# Altium PCB NEpic.PcbDoc (part 3 of 5)
Units mil, origin at the board's own origin, x right, y up, seen from the top; angles counter-clockwise.
Board outline 1660 x 1990 mil, 4 copper layers (Top Layer, GND, VCC, Bottom Layer); 30 components, 61 nets, 194 pads, 84 vias.
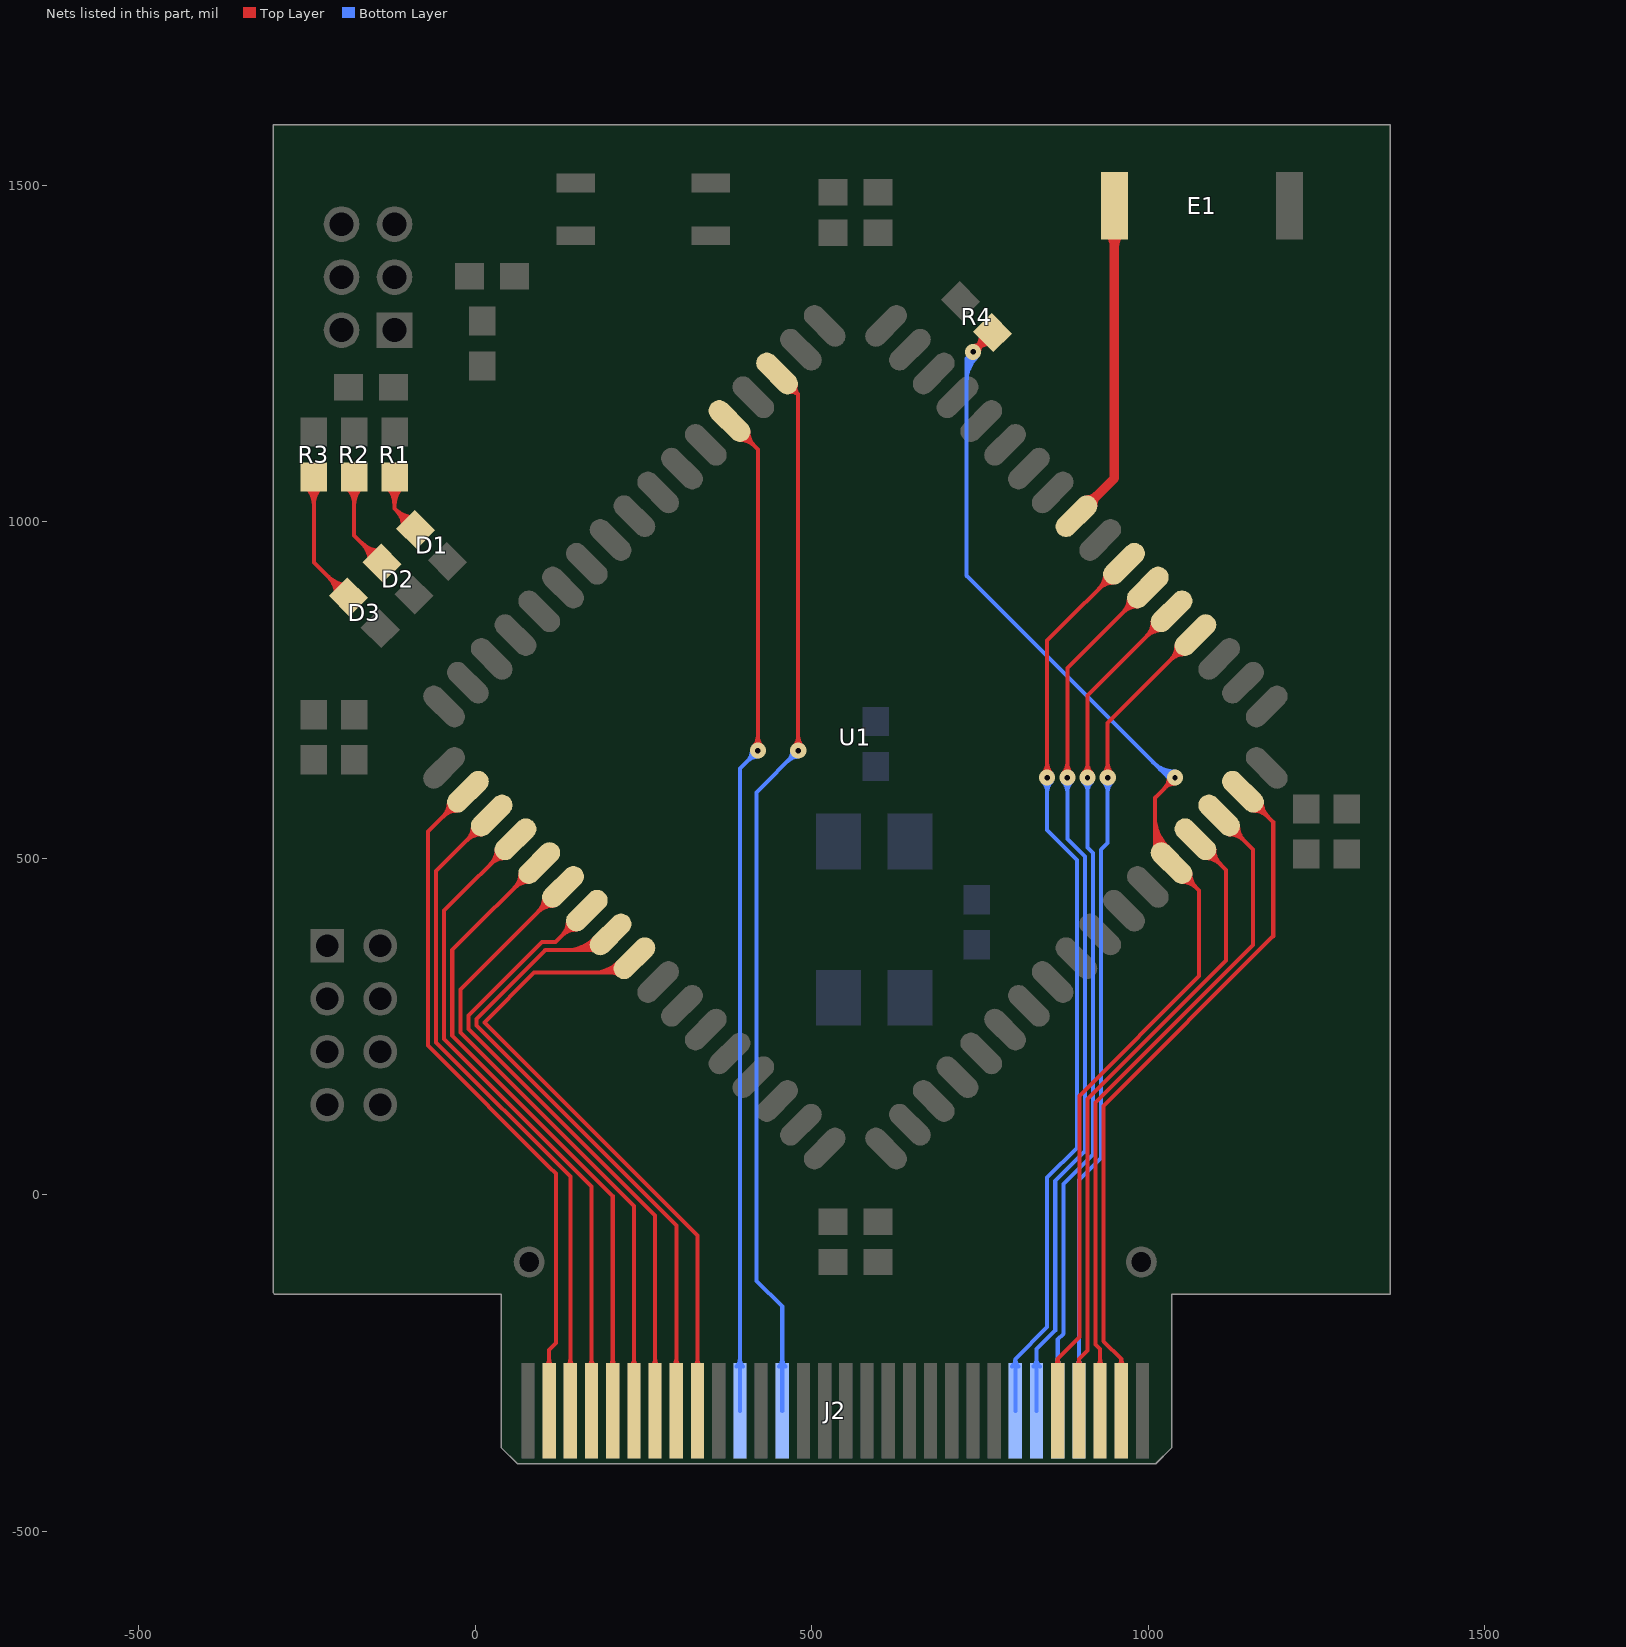
[diagram p5: the nets of this part, all layers, seen from the top]

## Via types
v1: diameter 24, hole 8, Top Layer to Bottom Layer, tented both sides, 78 vias
v2: diameter 150, hole 126, Top Layer to Bottom Layer, 4 vias
v3: diameter 40, hole 20, Top Layer to Bottom Layer, tented both sides, 2 vias

## Nets (pads, with @x,y where several pads share a name; then routed paths per layer and width w, separated by ;. In a path a pad name is that pad's centre, name@x,y a point inside that pad or via, vN(x,y) a via of type N, cw(c..) or ccw(c..) an arc to the next point about the centre after c; other vN are vias at no path point) (continued)
MOSI0/SDA: J2.39 U1.56 | length 2172.3
  Top Layer w6: U1.56@377.92,1149.92 418.92,1108.92 420,1107.84 v1(420,660) ; U1.56@393.23,1121.86 cw(c393.23,1091.08) 415,1112.85 ; U1.56@393.23,1121.86 cw(c393.23,1091.08) 415,1112.85 ; U1.56@393.23,1121.86 cw(c393.23,1091.08) 415,1112.85 ; U1.56@393.23,1121.86 cw(c393.23,1091.08) 415,1112.85 ; U1.56@393.23,1127.86 cw(c393.23,1111.57) 404.75,1123.09 ; U1.56@393.23,1127.86 cw(c393.23,1111.57) 404.75,1123.09 ; U1.56@393.23,1127.86 cw(c393.23,1111.57) 404.75,1123.09 ; U1.56@393.23,1127.86 cw(c393.23,1111.57) 404.75,1123.09 ; U1.56@399.98,1134.61 ccw(c416.27,1134.61) 404.75,1123.09 ; U1.56@399.98,1134.61 ccw(c416.27,1134.61) 404.75,1123.09 ; U1.56@399.98,1134.61 ccw(c416.27,1134.61) 404.75,1123.09 ; U1.56@399.98,1134.61 ccw(c416.27,1134.61) 404.75,1123.09 ; U1.56@405.98,1134.61 ccw(c436.76,1134.61) 415,1112.85 ; U1.56@405.98,1134.61 ccw(c436.76,1134.61) 415,1112.85 ; U1.56@405.98,1134.61 ccw(c436.76,1134.61) 415,1112.85 ; U1.56@405.98,1134.61 ccw(c436.76,1134.61) 415,1112.85 ; v1@413.64,666.36 ccw(c398.27,681.73) 420,681.73 ; v1@413.64,666.36 ccw(c398.27,681.73) 420,681.73 ; v1@413.64,666.36 ccw(c398.27,681.73) 420,681.73 ; v1@413.64,666.36 ccw(c398.27,681.73) 420,681.73 ; 420,681.73 ccw(c441.73,681.73) v1@426.36,666.36 ; 420,681.73 ccw(c441.73,681.73) v1@426.36,666.36 ; 420,681.73 ccw(c441.73,681.73) v1@426.36,666.36 ; 420,681.73 ccw(c441.73,681.73) v1@426.36,666.36
  Bottom Layer w6: J2.39@393.27,-321.26 393.27,633.27 v1(420,660) ; J2.39@388.43,-255.4 ccw(c376.75,-243.72) 393.27,-243.72 ; J2.39@388.43,-255.4 ccw(c376.75,-243.72) 393.27,-243.72 ; J2.39@388.43,-255.4 ccw(c376.75,-243.72) 393.27,-243.72 ; J2.39@388.43,-255.4 ccw(c376.75,-243.72) 393.27,-243.72 ; 393.27,-243.72 ccw(c409.79,-243.72) J2.39@398.11,-255.4 ; 393.27,-243.72 ccw(c409.79,-243.72) J2.39@398.11,-255.4 ; 393.27,-243.72 ccw(c409.79,-243.72) J2.39@398.11,-255.4 ; 393.27,-243.72 ccw(c409.79,-243.72) J2.39@398.11,-255.4 ; 404.64,644.64 cw(c420,629.27) v1@420,651 ; 404.64,644.64 ccw(c389.27,660) v1@411,660 ; 404.64,644.64 cw(c420,629.27) v1@420,651 ; 404.64,644.64 ccw(c389.27,660) v1@411,660 ; 404.64,644.64 ccw(c389.27,660) v1@411,660 ; 404.64,644.64 cw(c420,629.27) v1@420,651 ; 404.64,644.64 ccw(c389.27,660) v1@411,660 ; 404.64,644.64 cw(c420,629.27) v1@420,651
NetD1_1: D1.1 R1.2 | length 921.2
  Top Layer w6: R1.2@-120,1066.54 -120,1020 D1.1@-88.66,988.66 ; R1.2@-131.8,1052.77 cw(c-160.28,1024.29) -120,1024.29 ; R1.2@-131.8,1052.77 cw(c-160.28,1024.29) -120,1024.29 ; R1.2@-131.8,1052.77 cw(c-160.28,1024.29) -120,1024.29 ; R1.2@-131.8,1052.77 cw(c-160.28,1024.29) -120,1024.29 ; R1.2@-127.56,1057.01 cw(c-145.8,1038.77) -120,1038.77 ; R1.2@-127.56,1057.01 cw(c-145.8,1038.77) -120,1038.77 ; R1.2@-127.56,1057.01 cw(c-145.8,1038.77) -120,1038.77 ; R1.2@-127.56,1057.01 cw(c-145.8,1038.77) -120,1038.77 ; -120,1024.29 cw(c-79.72,1024.29) R1.2@-108.2,1052.77 ; -120,1024.29 cw(c-79.72,1024.29) R1.2@-108.2,1052.77 ; -120,1024.29 cw(c-79.72,1024.29) R1.2@-108.2,1052.77 ; -120,1024.29 cw(c-79.72,1024.29) R1.2@-108.2,1052.77 ; -120,1038.77 cw(c-94.2,1038.77) R1.2@-112.44,1057.01 ; -120,1038.77 cw(c-94.2,1038.77) R1.2@-112.44,1057.01 ; -120,1038.77 cw(c-94.2,1038.77) R1.2@-112.44,1057.01 ; -120,1038.77 cw(c-94.2,1038.77) R1.2@-112.44,1057.01 ; -118.54,1018.54 cw(c-147.02,990.05) D1.1@-106.74,990.05 ; -118.54,1018.54 ccw(c-90.05,1047.02) D1.1@-90.05,1006.74 ; -118.54,1018.54 cw(c-147.02,990.05) D1.1@-106.74,990.05 ; -118.54,1018.54 ccw(c-90.05,1047.02) D1.1@-90.05,1006.74 ; -118.54,1018.54 ccw(c-90.05,1047.02) D1.1@-90.05,1006.74 ; -118.54,1018.54 cw(c-147.02,990.05) D1.1@-106.74,990.05 ; -118.54,1018.54 ccw(c-90.05,1047.02) D1.1@-90.05,1006.74 ; -118.54,1018.54 cw(c-147.02,990.05) D1.1@-106.74,990.05 ; -108.3,1008.3 cw(c-126.54,990.05) D1.1@-100.74,990.05 ; -108.3,1008.3 ccw(c-90.05,1026.54) D1.1@-90.05,1000.74 ; -108.3,1008.3 cw(c-126.54,990.05) D1.1@-100.74,990.05 ; -108.3,1008.3 ccw(c-90.05,1026.54) D1.1@-90.05,1000.74 ; -108.3,1008.3 ccw(c-90.05,1026.54) D1.1@-90.05,1000.74 ; -108.3,1008.3 cw(c-126.54,990.05) D1.1@-100.74,990.05 ; -108.3,1008.3 ccw(c-90.05,1026.54) D1.1@-90.05,1000.74 ; -108.3,1008.3 cw(c-126.54,990.05) D1.1@-100.74,990.05
NetD2_1: D2.1 R2.2 | length 975.3
  Top Layer w6: R2.2@-180,1066.54 -180,980 D2.1@-138.66,938.66 ; R2.2@-191.8,1052.77 cw(c-220.28,1024.29) -180,1024.29 ; R2.2@-191.8,1052.77 cw(c-220.28,1024.29) -180,1024.29 ; R2.2@-191.8,1052.77 cw(c-220.28,1024.29) -180,1024.29 ; R2.2@-191.8,1052.77 cw(c-220.28,1024.29) -180,1024.29 ; R2.2@-187.56,1057.01 cw(c-205.8,1038.77) -180,1038.77 ; R2.2@-187.56,1057.01 cw(c-205.8,1038.77) -180,1038.77 ; R2.2@-187.56,1057.01 cw(c-205.8,1038.77) -180,1038.77 ; R2.2@-187.56,1057.01 cw(c-205.8,1038.77) -180,1038.77 ; -180,1024.29 cw(c-139.72,1024.29) R2.2@-168.2,1052.77 ; -180,1024.29 cw(c-139.72,1024.29) R2.2@-168.2,1052.77 ; -180,1024.29 cw(c-139.72,1024.29) R2.2@-168.2,1052.77 ; -180,1024.29 cw(c-139.72,1024.29) R2.2@-168.2,1052.77 ; -180,1038.77 cw(c-154.2,1038.77) R2.2@-172.44,1057.01 ; -180,1038.77 cw(c-154.2,1038.77) R2.2@-172.44,1057.01 ; -180,1038.77 cw(c-154.2,1038.77) R2.2@-172.44,1057.01 ; -180,1038.77 cw(c-154.2,1038.77) R2.2@-172.44,1057.01 ; -168.54,968.54 cw(c-197.02,940.05) D2.1@-156.74,940.05 ; -168.54,968.54 ccw(c-140.05,997.02) D2.1@-140.05,956.74 ; -168.54,968.54 cw(c-197.02,940.05) D2.1@-156.74,940.05 ; -168.54,968.54 ccw(c-140.05,997.02) D2.1@-140.05,956.74 ; -168.54,968.54 ccw(c-140.05,997.02) D2.1@-140.05,956.74 ; -168.54,968.54 cw(c-197.02,940.05) D2.1@-156.74,940.05 ; -168.54,968.54 ccw(c-140.05,997.02) D2.1@-140.05,956.74 ; -168.54,968.54 cw(c-197.02,940.05) D2.1@-156.74,940.05 ; -158.3,958.3 cw(c-176.54,940.05) D2.1@-150.74,940.05 ; -158.3,958.3 ccw(c-140.05,976.54) D2.1@-140.05,950.74 ; -158.3,958.3 cw(c-176.54,940.05) D2.1@-150.74,940.05 ; -158.3,958.3 ccw(c-140.05,976.54) D2.1@-140.05,950.74 ; -158.3,958.3 ccw(c-140.05,976.54) D2.1@-140.05,950.74 ; -158.3,958.3 cw(c-176.54,940.05) D2.1@-150.74,940.05 ; -158.3,958.3 ccw(c-140.05,976.54) D2.1@-140.05,950.74 ; -158.3,958.3 cw(c-176.54,940.05) D2.1@-150.74,940.05
NetD3_1: D3.1 R3.2 | length 1029.5
  Top Layer w6: R3.2@-240,1066.54 -240,940 D3.1@-188.66,888.66 ; R3.2@-251.8,1052.77 cw(c-280.28,1024.29) -240,1024.29 ; R3.2@-251.8,1052.77 cw(c-280.28,1024.29) -240,1024.29 ; R3.2@-251.8,1052.77 cw(c-280.28,1024.29) -240,1024.29 ; R3.2@-251.8,1052.77 cw(c-280.28,1024.29) -240,1024.29 ; R3.2@-247.56,1057.01 cw(c-265.8,1038.77) -240,1038.77 ; R3.2@-247.56,1057.01 cw(c-265.8,1038.77) -240,1038.77 ; R3.2@-247.56,1057.01 cw(c-265.8,1038.77) -240,1038.77 ; R3.2@-247.56,1057.01 cw(c-265.8,1038.77) -240,1038.77 ; -240,1024.29 cw(c-199.72,1024.29) R3.2@-228.2,1052.77 ; -240,1024.29 cw(c-199.72,1024.29) R3.2@-228.2,1052.77 ; -240,1024.29 cw(c-199.72,1024.29) R3.2@-228.2,1052.77 ; -240,1024.29 cw(c-199.72,1024.29) R3.2@-228.2,1052.77 ; -240,1038.77 cw(c-214.2,1038.77) R3.2@-232.44,1057.01 ; -240,1038.77 cw(c-214.2,1038.77) R3.2@-232.44,1057.01 ; -240,1038.77 cw(c-214.2,1038.77) R3.2@-232.44,1057.01 ; -240,1038.77 cw(c-214.2,1038.77) R3.2@-232.44,1057.01 ; -218.54,918.54 cw(c-247.02,890.05) D3.1@-206.74,890.05 ; -218.54,918.54 ccw(c-190.05,947.02) D3.1@-190.05,906.74 ; -218.54,918.54 cw(c-247.02,890.05) D3.1@-206.74,890.05 ; -218.54,918.54 ccw(c-190.05,947.02) D3.1@-190.05,906.74 ; -218.54,918.54 ccw(c-190.05,947.02) D3.1@-190.05,906.74 ; -218.54,918.54 cw(c-247.02,890.05) D3.1@-206.74,890.05 ; -218.54,918.54 ccw(c-190.05,947.02) D3.1@-190.05,906.74 ; -218.54,918.54 cw(c-247.02,890.05) D3.1@-206.74,890.05 ; -208.3,908.3 cw(c-226.54,890.05) D3.1@-200.74,890.05 ; -208.3,908.3 ccw(c-190.05,926.54) D3.1@-190.05,900.74 ; -208.3,908.3 cw(c-226.54,890.05) D3.1@-200.74,890.05 ; -208.3,908.3 ccw(c-190.05,926.54) D3.1@-190.05,900.74 ; -208.3,908.3 ccw(c-190.05,926.54) D3.1@-190.05,900.74 ; -208.3,908.3 cw(c-226.54,890.05) D3.1@-200.74,890.05 ; -208.3,908.3 ccw(c-190.05,926.54) D3.1@-190.05,900.74 ; -208.3,908.3 cw(c-226.54,890.05) D3.1@-200.74,890.05
NetE1_1: E1.1 U1.43 | length 804.8
  Top Layer w14: U1.43@893.5,1008.5 950,1065 E1.1@950,1460 ; U1.43@908.81,1032.56 ccw(c908.81,1053.68) 923.74,1038.74 ; U1.43@908.81,1032.56 ccw(c908.81,1053.68) 923.74,1038.74 ; U1.43@908.81,1032.56 ccw(c908.81,1053.68) 923.74,1038.74 ; U1.43@908.81,1032.56 ccw(c908.81,1053.68) 923.74,1038.74 ; U1.43@917.56,1023.81 cw(c938.68,1023.81) 923.74,1038.74 ; U1.43@917.56,1023.81 cw(c938.68,1023.81) 923.74,1038.74 ; U1.43@917.56,1023.81 cw(c938.68,1023.81) 923.74,1038.74 ; U1.43@917.56,1023.81 cw(c938.68,1023.81) 923.74,1038.74 ; E1.1@940.81,1430.81 cw(c918.61,1408.62) 950,1408.62 ; E1.1@940.81,1430.81 cw(c918.61,1408.62) 950,1408.62 ; E1.1@940.81,1430.81 cw(c918.61,1408.62) 950,1408.62 ; E1.1@940.81,1430.81 cw(c918.61,1408.62) 950,1408.62 ; 950,1408.62 cw(c981.38,1408.62) E1.1@959.19,1430.81 ; 950,1408.62 cw(c981.38,1408.62) E1.1@959.19,1430.81 ; 950,1408.62 cw(c981.38,1408.62) E1.1@959.19,1430.81 ; 950,1408.62 cw(c981.38,1408.62) E1.1@959.19,1430.81
ONEWIRE: J2.35 U1.54 | length 2086.6
  Top Layer w6: U1.54@448.63,1220.63 480,1189.26 ; v1(480,660) 480,1130.74 480,1189.26 ; U1.54@466.95,1192.93 cw(c470.21,1179.48) 480,1189.26 ; U1.54@466.95,1192.93 cw(c470.21,1179.48) 480,1189.26 ; U1.54@466.95,1192.93 cw(c470.21,1179.48) 480,1189.26 ; U1.54@466.95,1192.93 cw(c470.21,1179.48) 480,1189.26 ; v1@473.64,666.36 ccw(c458.27,681.73) 480,681.73 ; v1@473.64,666.36 ccw(c458.27,681.73) 480,681.73 ; v1@473.64,666.36 ccw(c458.27,681.73) 480,681.73 ; v1@473.64,666.36 ccw(c458.27,681.73) 480,681.73 ; U1.54@476.33,1202.32 ccw(c489.79,1199.05) 480,1189.26 ; U1.54@476.33,1202.32 ccw(c489.79,1199.05) 480,1189.26 ; U1.54@476.33,1202.32 ccw(c489.79,1199.05) 480,1189.26 ; U1.54@476.33,1202.32 ccw(c489.79,1199.05) 480,1189.26 ; 480,681.73 ccw(c501.73,681.73) v1@486.36,666.36 ; 480,681.73 ccw(c501.73,681.73) v1@486.36,666.36 ; 480,681.73 ccw(c501.73,681.73) v1@486.36,666.36 ; 480,681.73 ccw(c501.73,681.73) v1@486.36,666.36
  Bottom Layer w6: J2.35@456.26,-321.26 456.26,-166.26 418,-128 418,598 v1(480,660) ; J2.35@451.42,-255.4 ccw(c439.74,-243.72) 456.26,-243.72 ; J2.35@451.42,-255.4 ccw(c439.74,-243.72) 456.26,-243.72 ; J2.35@451.42,-255.4 ccw(c439.74,-243.72) 456.26,-243.72 ; J2.35@451.42,-255.4 ccw(c439.74,-243.72) 456.26,-243.72 ; 456.26,-243.72 ccw(c472.78,-243.72) J2.35@461.1,-255.4 ; 456.26,-243.72 ccw(c472.78,-243.72) J2.35@461.1,-255.4 ; 456.26,-243.72 ccw(c472.78,-243.72) J2.35@461.1,-255.4 ; 456.26,-243.72 ccw(c472.78,-243.72) J2.35@461.1,-255.4 ; 464.64,644.64 cw(c480,629.27) v1@480,651 ; 464.64,644.64 ccw(c449.27,660) v1@471,660 ; 464.64,644.64 cw(c480,629.27) v1@480,651 ; 464.64,644.64 ccw(c449.27,660) v1@471,660 ; 464.64,644.64 ccw(c449.27,660) v1@471,660 ; 464.64,644.64 cw(c480,629.27) v1@480,651 ; 464.64,644.64 ccw(c449.27,660) v1@471,660 ; 464.64,644.64 cw(c480,629.27) v1@480,651
P1.2: J2.10 R4.2 U1.30 | length 2947.6
  Top Layer w6: v1(740,1252.67) R4.2@768.66,1281.34 ; J2.10@865.71,-321.26 865.71,-244 ; 1010,533.24 ccw(c1044.61,533.24) U1.30@1020.14,508.76 ; 1010,547.72 ccw(c1059.1,547.72) U1.30@1024.38,513.01 ; 1010,562.21 ccw(c1073.58,562.21) U1.30@1028.62,517.25 ; v1@1031,620 cw(c1009.27,620) 1024.64,604.64 cw(c1040,589.27) v1@1040,611 ; v1(1040,620) 1010,590 1010,517.84 U1.30@1034.92,492.92 1076,451.84 1076,325.09 898,147.09 898,-211.71 865.71,-244 ; v1@740.18,1252.85 cw(c768.66,1224.37) 768.66,1264.65 ccw(c768.66,1224.37) v1@740.18,1252.85 ; v1@740.18,1252.85 ccw(c711.7,1281.34) 751.98,1281.34 cw(c711.7,1281.34) v1@740.18,1252.85 ; 750.42,1263.1 cw(c768.66,1244.86) 768.66,1270.65 ccw(c768.66,1244.86) 750.42,1263.1 ; 750.42,1263.1 ccw(c732.18,1281.34) 757.98,1281.34 cw(c732.18,1281.34) 750.42,1263.1 ; R4.2@755.36,1268.04 cw(c740,1283.4) 740,1261.67 ccw(c740,1283.4) R4.2@755.36,1268.04 ; R4.2@755.36,1268.04 ccw(c770.73,1252.67) 749,1252.67 cw(c770.73,1252.67) R4.2@755.36,1268.04 ; J2.10@860.93,-255.34 ccw(c849.87,-244) 865.71,-244 ; J2.10@860.93,-255.34 ccw(c849.87,-244) 865.71,-244 ; J2.10@860.93,-255.34 ccw(c849.87,-244) 865.71,-244 ; J2.10@860.93,-255.34 ccw(c849.87,-244) 865.71,-244 ; 865.71,-244 ccw(c881.55,-244) J2.10@870.49,-255.34 ; 865.71,-244 ccw(c881.55,-244) J2.10@870.49,-255.34 ; 865.71,-244 ccw(c881.55,-244) J2.10@870.49,-255.34 ; 865.71,-244 ccw(c881.55,-244) J2.10@870.49,-255.34 ; U1.30@1050.23,464.86 cw(c1050.23,434.09) 1071.99,455.85 ; U1.30@1050.23,464.86 cw(c1050.23,434.09) 1071.99,455.85 ; U1.30@1050.23,464.86 cw(c1050.23,434.09) 1071.99,455.85 ; U1.30@1050.23,464.86 cw(c1050.23,434.09) 1071.99,455.85 ; U1.30@1050.23,470.86 cw(c1050.23,454.57) 1061.75,466.09 ; U1.30@1050.23,470.86 cw(c1050.23,454.57) 1061.75,466.09 ; U1.30@1050.23,470.86 cw(c1050.23,454.57) 1061.75,466.09 ; U1.30@1050.23,470.86 cw(c1050.23,454.57) 1061.75,466.09 ; U1.30@1056.98,477.61 ccw(c1073.27,477.61) 1061.75,466.09 ; U1.30@1056.98,477.61 ccw(c1073.27,477.61) 1061.75,466.09 ; U1.30@1056.98,477.61 ccw(c1073.27,477.61) 1061.75,466.09 ; U1.30@1056.98,477.61 ccw(c1073.27,477.61) 1061.75,466.09 ; U1.30@1062.98,477.61 ccw(c1093.76,477.61) 1071.99,455.85 ; U1.30@1062.98,477.61 ccw(c1093.76,477.61) 1071.99,455.85 ; U1.30@1062.98,477.61 ccw(c1093.76,477.61) 1071.99,455.85 ; U1.30@1062.98,477.61 ccw(c1093.76,477.61) 1071.99,455.85
  Bottom Layer w6: 730,1206.8 cw(c785.87,1206.8) v1@746.36,1246.31 ; 730,1221.29 cw(c771.38,1221.29) v1@742.12,1250.55 ; 730,1235.77 cw(c756.9,1235.77) v1@737.88,1254.8 ; v1(740,1252.67) 730,1242.67 730,920 1030,620 v1(1040,620) ; 1007.56,642.44 ccw(c1040,674.87) 1040,629 cw(c1040,674.87) 1007.56,642.44 ; 1017.81,632.19 ccw(c1040,654.38) 1040,623 cw(c1040,654.38) 1017.81,632.19 ; 1028.05,621.95 ccw(c1040,633.9) 1040,617 cw(c1040,633.9) 1028.05,621.95
P1.5: J2.8 U1.31 | length 1355.9
  Top Layer w6: J2.8@897.2,-321.26 897.2,-244 ; U1.31@1070.28,528.28 1116,482.55 1116,348.12 910,142.12 910,-231.2 897.2,-244 ; J2.8@892.43,-255.34 ccw(c881.37,-244) 897.2,-244 ; J2.8@892.43,-255.34 ccw(c881.37,-244) 897.2,-244 ; J2.8@892.43,-255.34 ccw(c881.37,-244) 897.2,-244 ; J2.8@892.43,-255.34 ccw(c881.37,-244) 897.2,-244 ; 897.2,-244 ccw(c913.04,-244) J2.8@901.98,-255.34 ; 897.2,-244 ccw(c913.04,-244) J2.8@901.98,-255.34 ; 897.2,-244 ccw(c913.04,-244) J2.8@901.98,-255.34 ; 897.2,-244 ccw(c913.04,-244) J2.8@901.98,-255.34 ; U1.31@1085.59,500.22 cw(c1085.59,469.44) 1107.35,491.2 ; U1.31@1085.59,500.22 cw(c1085.59,469.44) 1107.35,491.2 ; U1.31@1085.59,500.22 cw(c1085.59,469.44) 1107.35,491.2 ; U1.31@1085.59,500.22 cw(c1085.59,469.44) 1107.35,491.2 ; U1.31@1085.59,506.22 cw(c1085.59,489.93) 1097.11,501.45 ; U1.31@1085.59,506.22 cw(c1085.59,489.93) 1097.11,501.45 ; U1.31@1085.59,506.22 cw(c1085.59,489.93) 1097.11,501.45 ; U1.31@1085.59,506.22 cw(c1085.59,489.93) 1097.11,501.45 ; U1.31@1092.34,512.97 ccw(c1108.63,512.97) 1097.11,501.45 ; U1.31@1092.34,512.97 ccw(c1108.63,512.97) 1097.11,501.45 ; U1.31@1092.34,512.97 ccw(c1108.63,512.97) 1097.11,501.45 ; U1.31@1092.34,512.97 ccw(c1108.63,512.97) 1097.11,501.45 ; U1.31@1098.34,512.97 ccw(c1129.11,512.97) 1107.35,491.2 ; U1.31@1098.34,512.97 ccw(c1129.11,512.97) 1107.35,491.2 ; U1.31@1098.34,512.97 ccw(c1129.11,512.97) 1107.35,491.2 ; U1.31@1098.34,512.97 ccw(c1129.11,512.97) 1107.35,491.2
P1.6: J2.6 U1.32 | length 1405
  Top Layer w6: J2.6@928.7,-321.26 928.7,-229.47 922,-222.77 922,137.15 1156,371.15 1156,513.26 U1.32@1105.63,563.63 ; J2.6@923.86,-255.4 ccw(c912.18,-243.72) 928.7,-243.72 ; J2.6@923.86,-255.4 ccw(c912.18,-243.72) 928.7,-243.72 ; J2.6@923.86,-255.4 ccw(c912.18,-243.72) 928.7,-243.72 ; J2.6@923.86,-255.4 ccw(c912.18,-243.72) 928.7,-243.72 ; 928.7,-243.72 ccw(c945.22,-243.72) J2.6@933.54,-255.4 ; 928.7,-243.72 ccw(c945.22,-243.72) J2.6@933.54,-255.4 ; 928.7,-243.72 ccw(c945.22,-243.72) J2.6@933.54,-255.4 ; 928.7,-243.72 ccw(c945.22,-243.72) J2.6@933.54,-255.4 ; U1.32@1120.94,535.57 cw(c1120.94,504.8) 1142.7,526.56 ; U1.32@1120.94,535.57 cw(c1120.94,504.8) 1142.7,526.56 ; U1.32@1120.94,535.57 cw(c1120.94,504.8) 1142.7,526.56 ; U1.32@1120.94,535.57 cw(c1120.94,504.8) 1142.7,526.56 ; U1.32@1120.94,541.57 cw(c1120.94,525.28) 1132.46,536.8 ; U1.32@1120.94,541.57 cw(c1120.94,525.28) 1132.46,536.8 ; U1.32@1120.94,541.57 cw(c1120.94,525.28) 1132.46,536.8 ; U1.32@1120.94,541.57 cw(c1120.94,525.28) 1132.46,536.8 ; U1.32@1127.69,548.32 ccw(c1143.98,548.32) 1132.46,536.8 ; U1.32@1127.69,548.32 ccw(c1143.98,548.32) 1132.46,536.8 ; U1.32@1127.69,548.32 ccw(c1143.98,548.32) 1132.46,536.8 ; U1.32@1127.69,548.32 ccw(c1143.98,548.32) 1132.46,536.8 ; U1.32@1133.69,548.32 ccw(c1164.47,548.32) 1142.7,526.56 ; U1.32@1133.69,548.32 ccw(c1164.47,548.32) 1142.7,526.56 ; U1.32@1133.69,548.32 ccw(c1164.47,548.32) 1142.7,526.56 ; U1.32@1133.69,548.32 ccw(c1164.47,548.32) 1142.7,526.56
P1.7: J2.4 U1.33 | length 1450.9
  Top Layer w6: J2.4@960.2,-321.26 960.2,-244 ; U1.33@1140.99,598.99 1186,553.98 1186,384.18 934,132.18 934,-217.8 960.2,-244 ; J2.4@955.42,-255.34 ccw(c944.36,-244) 960.2,-244 ; J2.4@955.42,-255.34 ccw(c944.36,-244) 960.2,-244 ; J2.4@955.42,-255.34 ccw(c944.36,-244) 960.2,-244 ; J2.4@955.42,-255.34 ccw(c944.36,-244) 960.2,-244 ; 960.2,-244 ccw(c976.04,-244) J2.4@964.98,-255.34 ; 960.2,-244 ccw(c976.04,-244) J2.4@964.98,-255.34 ; 960.2,-244 ccw(c976.04,-244) J2.4@964.98,-255.34 ; 960.2,-244 ccw(c976.04,-244) J2.4@964.98,-255.34 ; U1.33@1156.3,570.93 cw(c1156.3,540.15) 1178.06,561.92 ; U1.33@1156.3,570.93 cw(c1156.3,540.15) 1178.06,561.92 ; U1.33@1156.3,570.93 cw(c1156.3,540.15) 1178.06,561.92 ; U1.33@1156.3,570.93 cw(c1156.3,540.15) 1178.06,561.92 ; U1.33@1156.3,576.93 cw(c1156.3,560.64) 1167.82,572.16 ; U1.33@1156.3,576.93 cw(c1156.3,560.64) 1167.82,572.16 ; U1.33@1156.3,576.93 cw(c1156.3,560.64) 1167.82,572.16 ; U1.33@1156.3,576.93 cw(c1156.3,560.64) 1167.82,572.16 ; U1.33@1163.05,583.68 ccw(c1179.34,583.68) 1167.82,572.16 ; U1.33@1163.05,583.68 ccw(c1179.34,583.68) 1167.82,572.16 ; U1.33@1163.05,583.68 ccw(c1179.34,583.68) 1167.82,572.16 ; U1.33@1163.05,583.68 ccw(c1179.34,583.68) 1167.82,572.16 ; U1.33@1169.05,583.68 ccw(c1199.82,583.68) 1178.06,561.92 ; U1.33@1169.05,583.68 ccw(c1199.82,583.68) 1178.06,561.92 ; U1.33@1169.05,583.68 ccw(c1199.82,583.68) 1178.06,561.92 ; U1.33@1169.05,583.68 ccw(c1199.82,583.68) 1178.06,561.92
P2.0: J2.7 U1.38 | length 1897.2
  Top Layer w6: v1(940,620) 940,701.45 U1.38@1070.28,831.72 ; v1@933.64,626.36 ccw(c918.27,641.73) 940,641.73 ; v1@933.64,626.36 ccw(c918.27,641.73) 940,641.73 ; v1@933.64,626.36 ccw(c918.27,641.73) 940,641.73 ; v1@933.64,626.36 ccw(c918.27,641.73) 940,641.73 ; 940,641.73 ccw(c961.73,641.73) v1@946.36,626.36 ; 940,641.73 ccw(c961.73,641.73) v1@946.36,626.36 ; 940,641.73 ccw(c961.73,641.73) v1@946.36,626.36 ; 940,641.73 ccw(c961.73,641.73) v1@946.36,626.36 ; 1033.2,794.65 cw(c1054.96,772.89) U1.38@1054.96,803.66 ; 1033.2,794.65 ccw(c1011.44,816.41) U1.38@1042.22,816.41 ; 1033.2,794.65 cw(c1054.96,772.89) U1.38@1054.96,803.66 ; 1033.2,794.65 ccw(c1011.44,816.41) U1.38@1042.22,816.41 ; 1033.2,794.65 cw(c1054.96,772.89) U1.38@1054.96,803.66 ; 1033.2,794.65 ccw(c1011.44,816.41) U1.38@1042.22,816.41 ; 1033.2,794.65 ccw(c1011.44,816.41) U1.38@1042.22,816.41 ; 1033.2,794.65 cw(c1054.96,772.89) U1.38@1054.96,803.66 ; 1043.45,804.89 cw(c1054.96,793.37) U1.38@1054.96,809.66 ; 1043.45,804.89 ccw(c1031.93,816.41) U1.38@1048.22,816.41 ; 1043.45,804.89 cw(c1054.96,793.37) U1.38@1054.96,809.66 ; 1043.45,804.89 ccw(c1031.93,816.41) U1.38@1048.22,816.41 ; 1043.45,804.89 cw(c1054.96,793.37) U1.38@1054.96,809.66 ; 1043.45,804.89 ccw(c1031.93,816.41) U1.38@1048.22,816.41 ; 1043.45,804.89 ccw(c1031.93,816.41) U1.38@1048.22,816.41 ; 1043.45,804.89 cw(c1054.96,793.37) U1.38@1054.96,809.66
  Bottom Layer w6: J2.7@897.2,-321.26 897.2,21.88 930,54.67 930,512.73 940,522.73 v1(940,620) ; J2.7@892.37,-255.4 ccw(c880.69,-243.72) 897.2,-243.72 ; J2.7@892.37,-255.4 ccw(c880.69,-243.72) 897.2,-243.72 ; J2.7@892.37,-255.4 ccw(c880.69,-243.72) 897.2,-243.72 ; J2.7@892.37,-255.4 ccw(c880.69,-243.72) 897.2,-243.72 ; 897.2,-243.72 ccw(c913.72,-243.72) J2.7@902.04,-255.4 ; 897.2,-243.72 ccw(c913.72,-243.72) J2.7@902.04,-255.4 ; 897.2,-243.72 ccw(c913.72,-243.72) J2.7@902.04,-255.4 ; 897.2,-243.72 ccw(c913.72,-243.72) J2.7@902.04,-255.4 ; v1@933.64,613.64 cw(c918.27,598.27) 940,598.27 ; v1@933.64,613.64 cw(c918.27,598.27) 940,598.27 ; v1@933.64,613.64 cw(c918.27,598.27) 940,598.27 ; v1@933.64,613.64 cw(c918.27,598.27) 940,598.27 ; 940,598.27 cw(c961.73,598.27) v1@946.36,613.64 ; 940,598.27 cw(c961.73,598.27) v1@946.36,613.64 ; 940,598.27 cw(c961.73,598.27) v1@946.36,613.64 ; 940,598.27 cw(c961.73,598.27) v1@946.36,613.64
P2.1: J2.9 U1.39 | length 1937.6
  Top Layer w6: v1(910,620) 910,742.16 U1.39@1034.92,867.08 ; v1@903.64,626.36 ccw(c888.27,641.73) 910,641.73 ; v1@903.64,626.36 ccw(c888.27,641.73) 910,641.73 ; v1@903.64,626.36 ccw(c888.27,641.73) 910,641.73 ; v1@903.64,626.36 ccw(c888.27,641.73) 910,641.73 ; 910,641.73 ccw(c931.73,641.73) v1@916.36,626.36 ; 910,641.73 ccw(c931.73,641.73) v1@916.36,626.36 ; 910,641.73 ccw(c931.73,641.73) v1@916.36,626.36 ; 910,641.73 ccw(c931.73,641.73) v1@916.36,626.36 ; 997.85,830 cw(c1019.61,808.24) U1.39@1019.61,839.02 ; 997.85,830 ccw(c976.08,851.77) U1.39@1006.86,851.77 ; 997.85,830 cw(c1019.61,808.24) U1.39@1019.61,839.02 ; 997.85,830 ccw(c976.08,851.77) U1.39@1006.86,851.77 ; 997.85,830 ccw(c976.08,851.77) U1.39@1006.86,851.77 ; 997.85,830 cw(c1019.61,808.24) U1.39@1019.61,839.02 ; 997.85,830 ccw(c976.08,851.77) U1.39@1006.86,851.77 ; 997.85,830 cw(c1019.61,808.24) U1.39@1019.61,839.02 ; 1008.09,840.25 cw(c1019.61,828.73) U1.39@1019.61,845.02 ; 1008.09,840.25 ccw(c996.57,851.77) U1.39@1012.86,851.77 ; 1008.09,840.25 cw(c1019.61,828.73) U1.39@1019.61,845.02 ; 1008.09,840.25 ccw(c996.57,851.77) U1.39@1012.86,851.77 ; 1008.09,840.25 cw(c1019.61,828.73) U1.39@1019.61,845.02 ; 1008.09,840.25 ccw(c996.57,851.77) U1.39@1012.86,851.77 ; 1008.09,840.25 ccw(c996.57,851.77) U1.39@1012.86,851.77 ; 1008.09,840.25 cw(c1019.61,828.73) U1.39@1019.61,845.02
  Bottom Layer w6: J2.9@865.71,-321.26 865.71,-214.95 874,-206.66 874,15.64 918,59.64 918,507.76 910,515.76 v1(910,620) ; J2.9@860.87,-255.4 ccw(c849.19,-243.72) 865.71,-243.72 ; J2.9@860.87,-255.4 ccw(c849.19,-243.72) 865.71,-243.72 ; J2.9@860.87,-255.4 ccw(c849.19,-243.72) 865.71,-243.72 ; J2.9@860.87,-255.4 ccw(c849.19,-243.72) 865.71,-243.72 ; 865.71,-243.72 ccw(c882.23,-243.72) J2.9@870.55,-255.4 ; 865.71,-243.72 ccw(c882.23,-243.72) J2.9@870.55,-255.4 ; 865.71,-243.72 ccw(c882.23,-243.72) J2.9@870.55,-255.4 ; 865.71,-243.72 ccw(c882.23,-243.72) J2.9@870.55,-255.4 ; v1@903.64,613.64 cw(c888.27,598.27) 910,598.27 ; v1@903.64,613.64 cw(c888.27,598.27) 910,598.27 ; v1@903.64,613.64 cw(c888.27,598.27) 910,598.27 ; v1@903.64,613.64 cw(c888.27,598.27) 910,598.27 ; 910,598.27 cw(c931.73,598.27) v1@916.36,613.64 ; 910,598.27 cw(c931.73,598.27) v1@916.36,613.64 ; 910,598.27 cw(c931.73,598.27) v1@916.36,613.64 ; 910,598.27 cw(c931.73,598.27) v1@916.36,613.64
P2.3: J2.11 U1.40 | length 1986.3
  Top Layer w6: v1(880,620) 880,782.87 U1.40@999.56,902.43 ; v1@873.64,626.36 ccw(c858.27,641.73) 880,641.73 ; v1@873.64,626.36 ccw(c858.27,641.73) 880,641.73 ; v1@873.64,626.36 ccw(c858.27,641.73) 880,641.73 ; v1@873.64,626.36 ccw(c858.27,641.73) 880,641.73 ; 880,641.73 ccw(c901.73,641.73) v1@886.36,626.36 ; 880,641.73 ccw(c901.73,641.73) v1@886.36,626.36 ; 880,641.73 ccw(c901.73,641.73) v1@886.36,626.36 ; 880,641.73 ccw(c901.73,641.73) v1@886.36,626.36 ; 962.49,865.36 cw(c984.25,843.6) U1.40@984.25,874.37 ; 962.49,865.36 ccw(c940.73,887.12) U1.40@971.5,887.12 ; 962.49,865.36 cw(c984.25,843.6) U1.40@984.25,874.37 ; 962.49,865.36 ccw(c940.73,887.12) U1.40@971.5,887.12 ; 962.49,865.36 ccw(c940.73,887.12) U1.40@971.5,887.12 ; 962.49,865.36 cw(c984.25,843.6) U1.40@984.25,874.37 ; 962.49,865.36 ccw(c940.73,887.12) U1.40@971.5,887.12 ; 962.49,865.36 cw(c984.25,843.6) U1.40@984.25,874.37 ; 972.73,875.6 cw(c984.25,864.08) U1.40@984.25,880.37 ; 972.73,875.6 ccw(c961.21,887.12) U1.40@977.5,887.12 ; 972.73,875.6 cw(c984.25,864.08) U1.40@984.25,880.37 ; 972.73,875.6 ccw(c961.21,887.12) U1.40@977.5,887.12 ; 972.73,875.6 cw(c984.25,864.08) U1.40@984.25,880.37 ; 972.73,875.6 ccw(c961.21,887.12) U1.40@977.5,887.12 ; 972.73,875.6 ccw(c961.21,887.12) U1.40@977.5,887.12 ; 972.73,875.6 cw(c984.25,864.08) U1.40@984.25,880.37
  Bottom Layer w6: J2.11@834.21,-321.26 834.21,-229.47 862,-201.69 862,20.61 906,64.61 906,502.79 880,528.79 v1(880,620) ; J2.11@829.37,-255.4 ccw(c817.69,-243.72) 834.21,-243.72 ; J2.11@829.37,-255.4 ccw(c817.69,-243.72) 834.21,-243.72 ; J2.11@829.37,-255.4 ccw(c817.69,-243.72) 834.21,-243.72 ; J2.11@829.37,-255.4 ccw(c817.69,-243.72) 834.21,-243.72 ; 834.21,-243.72 ccw(c850.73,-243.72) J2.11@839.05,-255.4 ; 834.21,-243.72 ccw(c850.73,-243.72) J2.11@839.05,-255.4 ; 834.21,-243.72 ccw(c850.73,-243.72) J2.11@839.05,-255.4 ; 834.21,-243.72 ccw(c850.73,-243.72) J2.11@839.05,-255.4 ; v1@873.64,613.64 cw(c858.27,598.27) 880,598.27 ; v1@873.64,613.64 cw(c858.27,598.27) 880,598.27 ; v1@873.64,613.64 cw(c858.27,598.27) 880,598.27 ; v1@873.64,613.64 cw(c858.27,598.27) 880,598.27 ; 880,598.27 cw(c901.73,598.27) v1@886.36,613.64 ; 880,598.27 cw(c901.73,598.27) v1@886.36,613.64 ; 880,598.27 cw(c901.73,598.27) v1@886.36,613.64 ; 880,598.27 cw(c901.73,598.27) v1@886.36,613.64
P2.6: J2.13 U1.41 | length 2032.3
  Top Layer w6: v1(850,620) 850,823.58 U1.41@964.21,937.79 ; v1@843.64,626.36 ccw(c828.27,641.73) 850,641.73 ; v1@843.64,626.36 ccw(c828.27,641.73) 850,641.73 ; v1@843.64,626.36 ccw(c828.27,641.73) 850,641.73 ; v1@843.64,626.36 ccw(c828.27,641.73) 850,641.73 ; 850,641.73 ccw(c871.73,641.73) v1@856.36,626.36 ; 850,641.73 ccw(c871.73,641.73) v1@856.36,626.36 ; 850,641.73 ccw(c871.73,641.73) v1@856.36,626.36 ; 850,641.73 ccw(c871.73,641.73) v1@856.36,626.36 ; 927.14,900.71 cw(c948.9,878.95) U1.41@948.9,909.73 ; 927.14,900.71 ccw(c905.37,922.48) U1.41@936.15,922.48 ; 927.14,900.71 cw(c948.9,878.95) U1.41@948.9,909.73 ; 927.14,900.71 ccw(c905.37,922.48) U1.41@936.15,922.48 ; 927.14,900.71 ccw(c905.37,922.48) U1.41@936.15,922.48 ; 927.14,900.71 cw(c948.9,878.95) U1.41@948.9,909.73 ; 927.14,900.71 ccw(c905.37,922.48) U1.41@936.15,922.48 ; 927.14,900.71 cw(c948.9,878.95) U1.41@948.9,909.73 ; 937.38,910.96 cw(c948.9,899.44) U1.41@948.9,915.73 ; 937.38,910.96 ccw(c925.86,922.48) U1.41@942.15,922.48 ; 937.38,910.96 cw(c948.9,899.44) U1.41@948.9,915.73 ; 937.38,910.96 ccw(c925.86,922.48) U1.41@942.15,922.48 ; 937.38,910.96 cw(c948.9,899.44) U1.41@948.9,915.73 ; 937.38,910.96 ccw(c925.86,922.48) U1.41@942.15,922.48 ; 937.38,910.96 ccw(c925.86,922.48) U1.41@942.15,922.48 ; 937.38,910.96 cw(c948.9,899.44) U1.41@948.9,915.73
  Bottom Layer w6: J2.13@802.72,-321.26 802.72,-244 ; v1(850,620) 850,541.82 894,497.82 894,69.58 850,25.58 850,-196.72 802.72,-244 ; J2.13@797.94,-255.34 ccw(c786.88,-244) 802.72,-244 ; J2.13@797.94,-255.34 ccw(c786.88,-244) 802.72,-244 ; J2.13@797.94,-255.34 ccw(c786.88,-244) 802.72,-244 ; J2.13@797.94,-255.34 ccw(c786.88,-244) 802.72,-244 ; 802.72,-244 ccw(c818.56,-244) J2.13@807.49,-255.34 ; 802.72,-244 ccw(c818.56,-244) J2.13@807.49,-255.34 ; 802.72,-244 ccw(c818.56,-244) J2.13@807.49,-255.34 ; 802.72,-244 ccw(c818.56,-244) J2.13@807.49,-255.34 ; v1@843.64,613.64 cw(c828.27,598.27) 850,598.27 ; v1@843.64,613.64 cw(c828.27,598.27) 850,598.27 ; v1@843.64,613.64 cw(c828.27,598.27) 850,598.27 ; v1@843.64,613.64 cw(c828.27,598.27) 850,598.27 ; 850,598.27 cw(c871.73,598.27) v1@856.36,613.64 ; 850,598.27 cw(c871.73,598.27) v1@856.36,613.64 ; 850,598.27 cw(c871.73,598.27) v1@856.36,613.64 ; 850,598.27 cw(c871.73,598.27) v1@856.36,613.64
P5.0: J2.58 U1.2 | length 1427.4
  Top Layer w6: U1.2@-10.99,598.99 -70.26,539.72 -70.26,221.47 109.8,41.4 120,31.21 120,-220.4 109.8,-230.59 J2.58@109.8,-321.26 ; -48.06,561.92 cw(c-26.3,540.15) U1.2@-26.3,570.93 ; -48.06,561.92 ccw(c-69.82,583.68) U1.2@-39.05,583.68 ; -48.06,561.92 cw(c-26.3,540.15) U1.2@-26.3,570.93 ; -48.06,561.92 ccw(c-69.82,583.68) U1.2@-39.05,583.68 ; -48.06,561.92 cw(c-26.3,540.15) U1.2@-26.3,570.93 ; -48.06,561.92 ccw(c-69.82,583.68) U1.2@-39.05,583.68 ; -48.06,561.92 ccw(c-69.82,583.68) U1.2@-39.05,583.68 ; -48.06,561.92 cw(c-26.3,540.15) U1.2@-26.3,570.93 ; -37.82,572.16 cw(c-26.3,560.64) U1.2@-26.3,576.93 ; -37.82,572.16 ccw(c-49.34,583.68) U1.2@-33.05,583.68 ; -37.82,572.16 cw(c-26.3,560.64) U1.2@-26.3,576.93 ; -37.82,572.16 ccw(c-49.34,583.68) U1.2@-33.05,583.68 ; -37.82,572.16 cw(c-26.3,560.64) U1.2@-26.3,576.93 ; -37.82,572.16 ccw(c-49.34,583.68) U1.2@-33.05,583.68 ; -37.82,572.16 ccw(c-49.34,583.68) U1.2@-33.05,583.68 ; -37.82,572.16 cw(c-26.3,560.64) U1.2@-26.3,576.93 ; J2.58@104.96,-255.4 ccw(c93.28,-243.72) 109.8,-243.72 ; J2.58@104.96,-255.4 ccw(c93.28,-243.72) 109.8,-243.72 ; J2.58@104.96,-255.4 ccw(c93.28,-243.72) 109.8,-243.72 ; J2.58@104.96,-255.4 ccw(c93.28,-243.72) 109.8,-243.72 ; 109.8,-243.72 ccw(c126.32,-243.72) J2.58@114.64,-255.4 ; 109.8,-243.72 ccw(c126.32,-243.72) J2.58@114.64,-255.4 ; 109.8,-243.72 ccw(c126.32,-243.72) J2.58@114.64,-255.4 ; 109.8,-243.72 ccw(c126.32,-243.72) J2.58@114.64,-255.4
P5.1: J2.56 U1.3 | length 1401.3
  Top Layer w6: U1.3@24.37,563.63 -58.26,481 -58.26,226.44 141.3,26.88 J2.56@141.3,-321.26 ; -12.7,526.56 cw(c9.06,504.8) U1.3@9.06,535.57 ; -12.7,526.56 ccw(c-34.47,548.32) U1.3@-3.69,548.32 ; -12.7,526.56 cw(c9.06,504.8) U1.3@9.06,535.57 ; -12.7,526.56 ccw(c-34.47,548.32) U1.3@-3.69,548.32 ; -12.7,526.56 cw(c9.06,504.8) U1.3@9.06,535.57 ; -12.7,526.56 ccw(c-34.47,548.32) U1.3@-3.69,548.32 ; -12.7,526.56 ccw(c-34.47,548.32) U1.3@-3.69,548.32 ; -12.7,526.56 cw(c9.06,504.8) U1.3@9.06,535.57 ; -2.46,536.8 cw(c9.06,525.28) U1.3@9.06,541.57 ; -2.46,536.8 ccw(c-13.98,548.32) U1.3@2.31,548.32 ; -2.46,536.8 cw(c9.06,525.28) U1.3@9.06,541.57 ; -2.46,536.8 ccw(c-13.98,548.32) U1.3@2.31,548.32 ; -2.46,536.8 cw(c9.06,525.28) U1.3@9.06,541.57 ; -2.46,536.8 ccw(c-13.98,548.32) U1.3@2.31,548.32 ; -2.46,536.8 ccw(c-13.98,548.32) U1.3@2.31,548.32 ; -2.46,536.8 cw(c9.06,525.28) U1.3@9.06,541.57 ; J2.56@136.46,-255.4 ccw(c124.78,-243.72) 141.3,-243.72 ; J2.56@136.46,-255.4 ccw(c124.78,-243.72) 141.3,-243.72 ; J2.56@136.46,-255.4 ccw(c124.78,-243.72) 141.3,-243.72 ; J2.56@136.46,-255.4 ccw(c124.78,-243.72) 141.3,-243.72 ; 141.3,-243.72 ccw(c157.82,-243.72) J2.56@146.14,-255.4 ; 141.3,-243.72 ccw(c157.82,-243.72) J2.56@146.14,-255.4 ; 141.3,-243.72 ccw(c157.82,-243.72) J2.56@146.14,-255.4 ; 141.3,-243.72 ccw(c157.82,-243.72) J2.56@146.14,-255.4
P5.2: J2.54 U1.4 | length 1383.7
  Top Layer w6: U1.4@59.72,528.28 -46.26,422.29 -46.26,231.41 172.8,12.35 J2.54@172.8,-321.26 ; 22.65,491.2 cw(c44.41,469.44) U1.4@44.41,500.22 ; 22.65,491.2 ccw(c0.89,512.97) U1.4@31.66,512.97 ; 22.65,491.2 cw(c44.41,469.44) U1.4@44.41,500.22 ; 22.65,491.2 ccw(c0.89,512.97) U1.4@31.66,512.97 ; 22.65,491.2 cw(c44.41,469.44) U1.4@44.41,500.22 ; 22.65,491.2 ccw(c0.89,512.97) U1.4@31.66,512.97 ; 22.65,491.2 ccw(c0.89,512.97) U1.4@31.66,512.97 ; 22.65,491.2 cw(c44.41,469.44) U1.4@44.41,500.22 ; 32.89,501.45 cw(c44.41,489.93) U1.4@44.41,506.22 ; 32.89,501.45 ccw(c21.37,512.97) U1.4@37.66,512.97 ; 32.89,501.45 cw(c44.41,489.93) U1.4@44.41,506.22 ; 32.89,501.45 ccw(c21.37,512.97) U1.4@37.66,512.97 ; 32.89,501.45 cw(c44.41,489.93) U1.4@44.41,506.22 ; 32.89,501.45 ccw(c21.37,512.97) U1.4@37.66,512.97 ; 32.89,501.45 ccw(c21.37,512.97) U1.4@37.66,512.97 ; 32.89,501.45 cw(c44.41,489.93) U1.4@44.41,506.22 ; J2.54@167.96,-255.4 ccw(c156.28,-243.72) 172.8,-243.72 ; J2.54@167.96,-255.4 ccw(c156.28,-243.72) 172.8,-243.72 ; J2.54@167.96,-255.4 ccw(c156.28,-243.72) 172.8,-243.72 ; J2.54@167.96,-255.4 ccw(c156.28,-243.72) 172.8,-243.72 ; 172.8,-243.72 ccw(c189.31,-243.72) J2.54@177.63,-255.4 ; 172.8,-243.72 ccw(c189.31,-243.72) J2.54@177.63,-255.4 ; 172.8,-243.72 ccw(c189.31,-243.72) J2.54@177.63,-255.4 ; 172.8,-243.72 ccw(c189.31,-243.72) J2.54@177.63,-255.4
P5.3: J2.52 U1.5 | length 1366.1
  Top Layer w6: U1.5@95.08,492.92 -34.26,363.58 -34.26,236.38 204.29,-2.17 J2.52@204.29,-321.26 ; 58.01,455.85 cw(c79.77,434.09) U1.5@79.77,464.86 ; 58.01,455.85 ccw(c36.24,477.61) U1.5@67.02,477.61 ; 58.01,455.85 cw(c79.77,434.09) U1.5@79.77,464.86 ; 58.01,455.85 ccw(c36.24,477.61) U1.5@67.02,477.61 ; 58.01,455.85 cw(c79.77,434.09) U1.5@79.77,464.86 ; 58.01,455.85 ccw(c36.24,477.61) U1.5@67.02,477.61 ; 58.01,455.85 ccw(c36.24,477.61) U1.5@67.02,477.61 ; 58.01,455.85 cw(c79.77,434.09) U1.5@79.77,464.86 ; 68.25,466.09 cw(c79.77,454.57) U1.5@79.77,470.86 ; 68.25,466.09 ccw(c56.73,477.61) U1.5@73.02,477.61 ; 68.25,466.09 cw(c79.77,454.57) U1.5@79.77,470.86 ; 68.25,466.09 ccw(c56.73,477.61) U1.5@73.02,477.61 ; 68.25,466.09 cw(c79.77,454.57) U1.5@79.77,470.86 ; 68.25,466.09 ccw(c56.73,477.61) U1.5@73.02,477.61 ; 68.25,466.09 ccw(c56.73,477.61) U1.5@73.02,477.61 ; 68.25,466.09 cw(c79.77,454.57) U1.5@79.77,470.86 ; J2.52@199.45,-255.4 ccw(c187.77,-243.72) 204.29,-243.72 ; J2.52@199.45,-255.4 ccw(c187.77,-243.72) 204.29,-243.72 ; J2.52@199.45,-255.4 ccw(c187.77,-243.72) 204.29,-243.72 ; J2.52@199.45,-255.4 ccw(c187.77,-243.72) 204.29,-243.72 ; 204.29,-243.72 ccw(c220.81,-243.72) J2.52@209.13,-255.4 ; 204.29,-243.72 ccw(c220.81,-243.72) J2.52@209.13,-255.4 ; 204.29,-243.72 ccw(c220.81,-243.72) J2.52@209.13,-255.4 ; 204.29,-243.72 ccw(c220.81,-243.72) J2.52@209.13,-255.4
P5.4: J2.50 U1.6 | length 1348.5
  Top Layer w6: U1.6@130.44,457.57 -22.26,304.87 -22.26,241.35 235.79,-16.7 J2.50@235.79,-321.26 ; 93.36,420.49 cw(c115.12,398.73) U1.6@115.12,429.51 ; 93.36,420.49 ccw(c71.6,442.26) U1.6@102.38,442.26 ; 93.36,420.49 cw(c115.12,398.73) U1.6@115.12,429.51 ; 93.36,420.49 ccw(c71.6,442.26) U1.6@102.38,442.26 ; 93.36,420.49 cw(c115.12,398.73) U1.6@115.12,429.51 ; 93.36,420.49 ccw(c71.6,442.26) U1.6@102.38,442.26 ; 93.36,420.49 ccw(c71.6,442.26) U1.6@102.38,442.26 ; 93.36,420.49 cw(c115.12,398.73) U1.6@115.12,429.51 ; 103.61,430.74 cw(c115.12,419.22) U1.6@115.12,435.51 ; 103.61,430.74 ccw(c92.09,442.26) U1.6@108.38,442.26 ; 103.61,430.74 cw(c115.12,419.22) U1.6@115.12,435.51 ; 103.61,430.74 ccw(c92.09,442.26) U1.6@108.38,442.26 ; 103.61,430.74 cw(c115.12,419.22) U1.6@115.12,435.51 ; 103.61,430.74 ccw(c92.09,442.26) U1.6@108.38,442.26 ; 103.61,430.74 ccw(c92.09,442.26) U1.6@108.38,442.26 ; 103.61,430.74 cw(c115.12,419.22) U1.6@115.12,435.51 ; J2.50@230.95,-255.4 ccw(c219.27,-243.72) 235.79,-243.72 ; J2.50@230.95,-255.4 ccw(c219.27,-243.72) 235.79,-243.72 ; J2.50@230.95,-255.4 ccw(c219.27,-243.72) 235.79,-243.72 ; J2.50@230.95,-255.4 ccw(c219.27,-243.72) 235.79,-243.72 ; 235.79,-243.72 ccw(c252.31,-243.72) J2.50@240.63,-255.4 ; 235.79,-243.72 ccw(c252.31,-243.72) J2.50@240.63,-255.4 ; 235.79,-243.72 ccw(c252.31,-243.72) J2.50@240.63,-255.4 ; 235.79,-243.72 ccw(c252.31,-243.72) J2.50@240.63,-255.4
P5.5: J2.48 U1.7 | length 1342.6
  Top Layer w6: U1.7@165.79,422.21 119.08,375.5 99.04,375.5 -10.26,266.2 -10.26,246.32 267.28,-31.22 J2.48@267.28,-321.26 ; 128.72,385.14 cw(c150.48,363.38) U1.7@150.48,394.15 ; 128.72,385.14 ccw(c106.95,406.9) U1.7@137.73,406.9 ; 128.72,385.14 cw(c150.48,363.38) U1.7@150.48,394.15 ; 128.72,385.14 ccw(c106.95,406.9) U1.7@137.73,406.9 ; 128.72,385.14 cw(c150.48,363.38) U1.7@150.48,394.15 ; 128.72,385.14 ccw(c106.95,406.9) U1.7@137.73,406.9 ; 128.72,385.14 ccw(c106.95,406.9) U1.7@137.73,406.9 ; 128.72,385.14 cw(c150.48,363.38) U1.7@150.48,394.15 ; 138.96,395.38 cw(c150.48,383.86) U1.7@150.48,400.15 ; 138.96,395.38 ccw(c127.44,406.9) U1.7@143.73,406.9 ; 138.96,395.38 cw(c150.48,383.86) U1.7@150.48,400.15 ; 138.96,395.38 ccw(c127.44,406.9) U1.7@143.73,406.9 ; 138.96,395.38 ccw(c127.44,406.9) U1.7@143.73,406.9 ; 138.96,395.38 cw(c150.48,383.86) U1.7@150.48,400.15 ; 138.96,395.38 ccw(c127.44,406.9) U1.7@143.73,406.9 ; 138.96,395.38 cw(c150.48,383.86) U1.7@150.48,400.15 ; J2.48@262.45,-255.4 ccw(c250.76,-243.72) 267.28,-243.72 ; J2.48@262.45,-255.4 ccw(c250.76,-243.72) 267.28,-243.72 ; J2.48@262.45,-255.4 ccw(c250.76,-243.72) 267.28,-243.72 ; J2.48@262.45,-255.4 ccw(c250.76,-243.72) 267.28,-243.72 ; 267.28,-243.72 ccw(c283.8,-243.72) J2.48@272.12,-255.4 ; 267.28,-243.72 ccw(c283.8,-243.72) J2.48@272.12,-255.4 ; 267.28,-243.72 ccw(c283.8,-243.72) J2.48@272.12,-255.4 ; 267.28,-243.72 ccw(c283.8,-243.72) J2.48@272.12,-255.4
P5.6: J2.46 U1.8 | length 1473.1
  Top Layer w6: U1.8@201.15,386.86 177.79,363.5 104.01,363.5 1.74,261.23 1.74,251.29 298.78,-45.75 J2.46@298.78,-321.26 ; 135.64,363.5 ccw(c135.64,421.74) U1.8@176.82,380.56 ; 135.64,363.5 ccw(c135.64,421.74) U1.8@176.82,380.56 ; 135.64,363.5 ccw(c135.64,421.74) U1.8@176.82,380.56 ; 135.64,363.5 ccw(c135.64,421.74) U1.8@176.82,380.56 ; 150.13,363.5 ccw(c150.13,407.25) U1.8@181.06,376.32 ; 150.13,363.5 ccw(c150.13,407.25) U1.8@181.06,376.32 ; 150.13,363.5 ccw(c150.13,407.25) U1.8@181.06,376.32 ; 150.13,363.5 ccw(c150.13,407.25) U1.8@181.06,376.32 ; 164.61,363.5 ccw(c164.61,392.77) U1.8@185.31,372.07 ; 164.61,363.5 ccw(c164.61,392.77) U1.8@185.31,372.07 ; 164.61,363.5 ccw(c164.61,392.77) U1.8@185.31,372.07 ; 164.61,363.5 ccw(c164.61,392.77) U1.8@185.31,372.07 ; J2.46@293.94,-255.4 ccw(c282.26,-243.72) 298.78,-243.72 ; J2.46@293.94,-255.4 ccw(c282.26,-243.72) 298.78,-243.72 ; J2.46@293.94,-255.4 ccw(c282.26,-243.72) 298.78,-243.72 ; J2.46@293.94,-255.4 ccw(c282.26,-243.72) 298.78,-243.72 ; 298.78,-243.72 ccw(c315.3,-243.72) J2.46@303.62,-255.4 ; 298.78,-243.72 ccw(c315.3,-243.72) J2.46@303.62,-255.4 ; 298.78,-243.72 ccw(c315.3,-243.72) J2.46@303.62,-255.4 ; 298.78,-243.72 ccw(c315.3,-243.72) J2.46@303.62,-255.4
P5.7: J2.44 U1.9 | length 1457.7
  Top Layer w6: U1.9@236.5,351.5 215,330 158.79,330 87.48,330 13.74,256.26 330.28,-60.28 J2.44@330.28,-321.26 ; 175.47,330 ccw(c175.47,381.91) U1.9@212.18,345.2 ; 175.47,330 ccw(c175.47,381.91) U1.9@212.18,345.2 ; 175.47,330 ccw(c175.47,381.91) U1.9@212.18,345.2 ; 175.47,330 ccw(c175.47,381.91) U1.9@212.18,345.2 ; 189.95,330 ccw(c189.95,367.43) U1.9@216.42,340.96 ; 189.95,330 ccw(c189.95,367.43) U1.9@216.42,340.96 ; 189.95,330 ccw(c189.95,367.43) U1.9@216.42,340.96 ; 189.95,330 ccw(c189.95,367.43) U1.9@216.42,340.96 ; 204.44,330 ccw(c204.44,352.94) U1.9@220.66,336.72 ; 204.44,330 ccw(c204.44,352.94) U1.9@220.66,336.72 ; 204.44,330 ccw(c204.44,352.94) U1.9@220.66,336.72 ; 204.44,330 ccw(c204.44,352.94) U1.9@220.66,336.72 ; 205.36,330 cw(c205.36,320.36) U1.9@212.18,327.18 ; 205.36,330 cw(c205.36,320.36) U1.9@212.18,327.18 ; 205.36,330 cw(c205.36,320.36) U1.9@212.18,327.18 ; 205.36,330 cw(c205.36,320.36) U1.9@212.18,327.18 ; J2.44@325.44,-255.4 ccw(c313.76,-243.72) 330.28,-243.72 ; J2.44@325.44,-255.4 ccw(c313.76,-243.72) 330.28,-243.72 ; J2.44@325.44,-255.4 ccw(c313.76,-243.72) 330.28,-243.72 ; J2.44@325.44,-255.4 ccw(c313.76,-243.72) 330.28,-243.72 ; 330.28,-243.72 ccw(c346.79,-243.72) J2.44@335.11,-255.4 ; 330.28,-243.72 ccw(c346.79,-243.72) J2.44@335.11,-255.4 ; 330.28,-243.72 ccw(c346.79,-243.72) J2.44@335.11,-255.4 ; 330.28,-243.72 ccw(c346.79,-243.72) J2.44@335.11,-255.4